# Altium PCB RbMotor_ECAT_RevB+.PcbDoc (part 4 of 4)
Units mm, origin at the board's own origin, x right, y up, seen from the top; angles counter-clockwise.
Board outline 58 x 58 mm, 4 copper layers (F.Cu, In1.Cu, In2.Cu, B.Cu); 285 components, 277 nets, 865 pads, 722 vias.
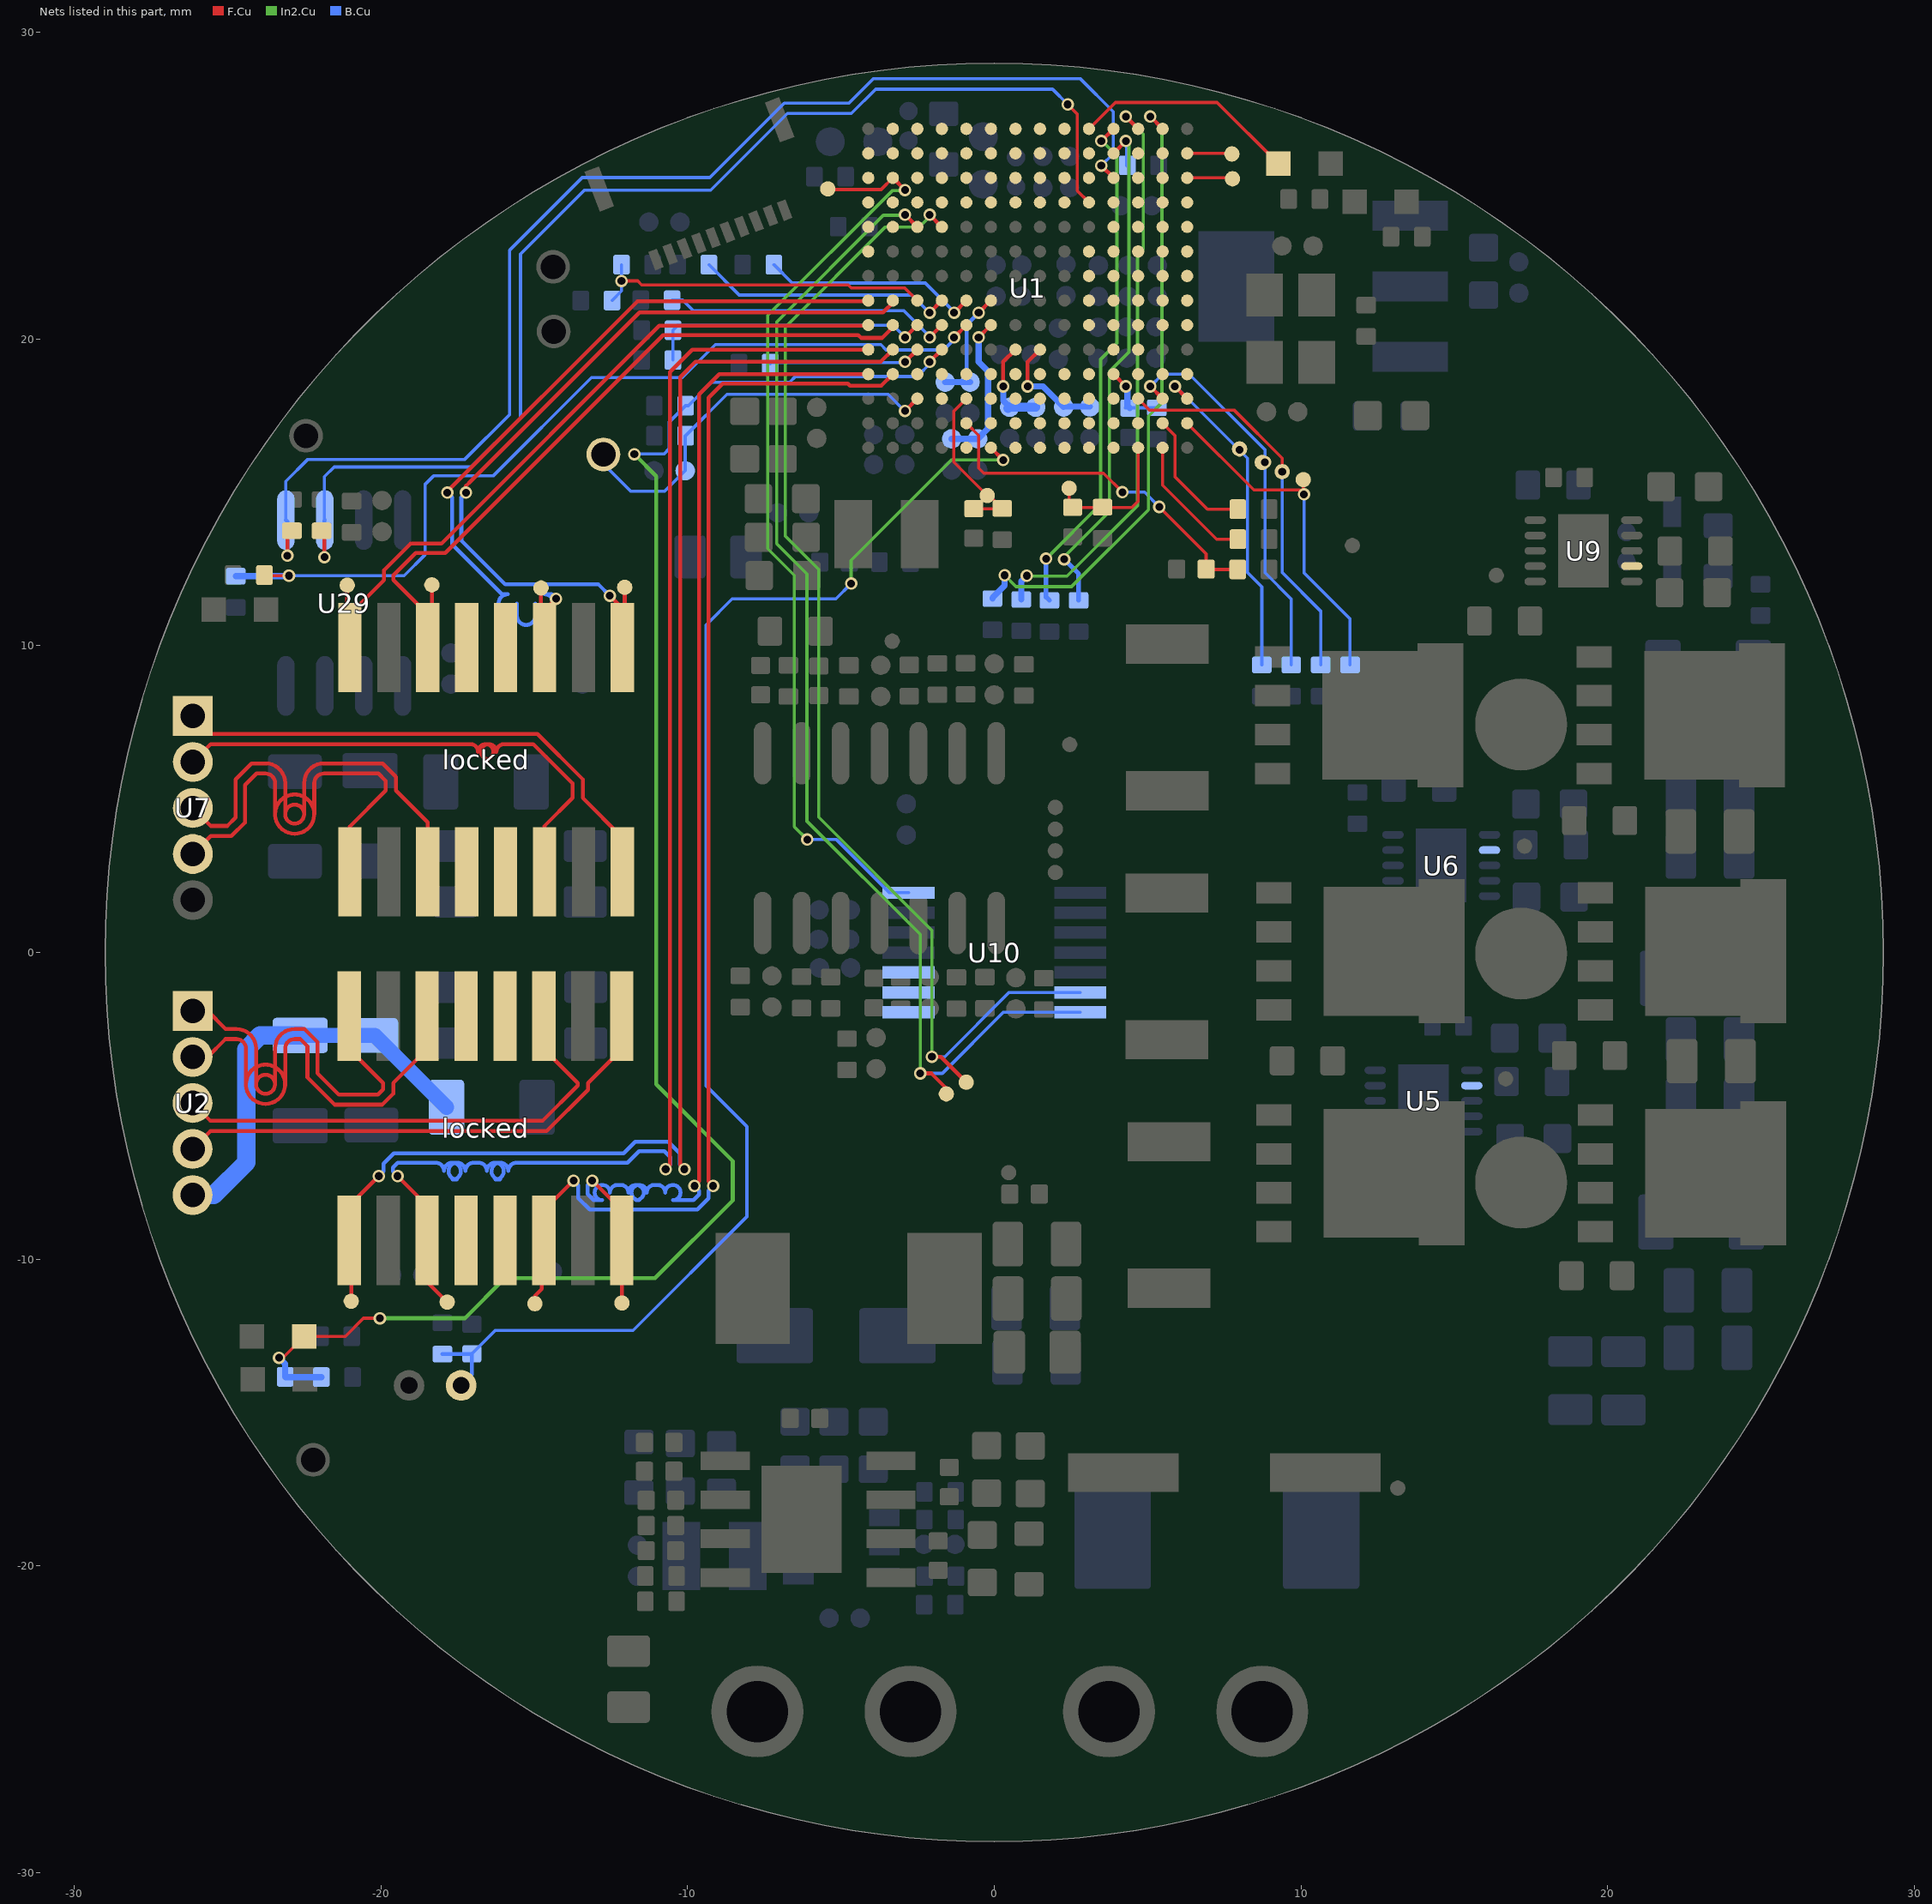
[diagram p5: the nets of this part, all layers, seen from the top]

## Via types
v1: diameter 0.406, hole 0.254, F.Cu to B.Cu, tented both sides, 720 vias
v2: diameter 0.5, hole 0.3, F.Cu to B.Cu, tented both sides, 2 vias

## Nets (pads, with @x,y where several pads share a name; then routed paths per layer and width w, separated by ;. In a path a pad name is that pad's centre, name@x,y a point inside that pad or via, vN(x,y) a via of type N, cw(c..) or ccw(c..) an arc to the next point about the centre after c; other vN are vias at no path point) (continued)
PA16: locked.8@-12.15,-9.391 TP25.1 U1.L1 | length 44
  F.Cu w0.127: v1(-13.115,-7.441) locked.8@-12.15,-8.406 ; locked.8@-12.15,-9.391 -12.145,-9.396 TP25.1@-12.145,-11.434 ; v1(-9.78,-7.615) -9.627,-7.462 -9.627,18.203 -8.97,18.86 U1.L1@-4.11,18.86
  B.Cu w0.127: v1(-13.115,-7.441) -13.268,-7.593 -13.268,-7.885 -13.072,-8.081 -12.785,-8.081 cw(c-12.785,-7.831) -12.535,-7.831 cw(c-12.285,-7.831) -12.285,-7.581 -12.185,-7.581 cw(c-12.185,-7.831) -11.935,-7.831 cw(c-11.685,-7.831) -11.685,-8.081 -11.585,-8.081 cw(c-11.585,-7.831) -11.335,-7.831 cw(c-11.085,-7.831) -11.085,-7.581 -10.985,-7.581 cw(c-10.985,-7.831) -10.735,-7.831 cw(c-10.485,-7.831) -10.485,-8.081 -10.385,-8.081 -9.814,-8.081 -9.627,-7.894 -9.627,-7.767 v1(-9.78,-7.615)
PA17: locked.6@-14.69,-9.391 TP24.1 U1.L2 | length 41.4
  F.Cu w0.127: TP24.1@-14.985,-11.454 -14.985,-11.204 -14.755,-10.974 -14.755,-9.456 locked.6@-14.69,-9.391 ; locked.6@-14.69,-8.406 v1(-13.725,-7.441) ; v1(-9.17,-7.615) -9.323,-7.462 -9.323,18.087 -8.86,18.55 -4.775,18.55 -4.705,18.48 -3.69,18.48 U1.L2@-3.31,18.86
  B.Cu w0.127: v1(-13.725,-7.441) -13.572,-7.593 -13.572,-8.012 -13.198,-8.386 -9.688,-8.386 -9.323,-8.021 -9.323,-7.767 v1(-9.17,-7.615)
PA18: locked.3@-18.5,-9.391 TP23.1 U1.K1 | length 52.5
  F.Cu w0.127: v1(-19.465,-7.294) -18.5,-8.259 locked.3@-18.5,-9.391 -18.5,-10.747 TP23.1@-17.845,-11.402 ; v1(-10.72,-7.07) -10.582,-6.932 -10.582,18.928 -9.85,19.66 U1.K1@-4.11,19.66
  B.Cu w0.127: v1(-19.465,-7.294) -19.618,-7.141 -19.618,-7.012 -19.462,-6.856 -18.225,-6.856 cw(c-18.225,-7.131) -17.95,-7.131 cw(c-17.675,-7.131) -17.675,-7.406 -17.525,-7.406 cw(c-17.525,-7.131) -17.25,-7.131 cw(c-16.975,-7.131) -16.975,-6.856 -16.825,-6.856 cw(c-16.825,-7.131) -16.55,-7.131 cw(c-16.275,-7.131) -16.275,-7.406 -16.125,-7.406 cw(c-16.125,-7.131) -15.85,-7.131 cw(c-15.575,-7.131) -15.575,-6.856 -15.425,-6.856 -11.962,-6.856 -11.587,-6.481 -10.763,-6.481 -10.567,-6.677 -10.567,-6.918 v1(-10.72,-7.07)
PA19: locked.1@-21.04,-9.391 TP22.1 U1.K2 | length 48.9
  F.Cu w0.127: TP22.1@-20.975,-11.374 -20.975,-9.456 locked.1@-21.04,-9.391 -21.04,-8.259 v1(-20.075,-7.294) ; v1(-10.11,-7.07) -10.248,-6.932 -10.248,18.762 -9.74,19.27 -3.7,19.27 U1.K2@-3.31,19.66
  B.Cu w0.127: v1(-20.075,-7.294) -19.922,-7.141 -19.922,-6.885 -19.588,-6.551 -12.088,-6.551 -11.713,-6.176 -10.637,-6.176 -10.263,-6.55 -10.263,-6.918 v1(-10.11,-7.07)
PA20: locked.8@-21.02,9.944 TP29.1 U1.J1 | length 24.2
  F.Cu w0.127: TP29.1@-21.105,11.976 -21.105,10.029 locked.8@-21.02,9.944 -21.02,11.024 -19.902,12.141 -19.902,12.469 -19.043,13.329 -18.038,13.329 -10.927,20.44 U1.J1@-4.06,20.44
PA21: locked.6@-18.48,9.944 TP28.1 U1.J2 | length 24.7
  F.Cu w0.127: TP28.1@-18.345,11.986 -18.345,10.079 locked.6@-18.48,9.944 -18.48,11.024 -19.598,12.141 -19.598,12.304 -18.877,13.024 -17.912,13.024 -10.801,20.135 -4.44,20.135 -4.345,20.04 -3.66,20.04 U1.J2@-3.26,20.44
PA22: locked.3@-14.67,9.944 TP27.1 U1.H1 | length 29.5
  F.Cu w0.127: v1(-17.84,14.996) -17.84,15.037 -11.637,21.24 -4.06,21.24 U1.H1@-4.14,21.16 ; TP27.1@-14.785,11.886 -14.785,10.059 locked.3@-14.67,9.944 -14.67,11.16 v1(-14.295,11.535)
  B.Cu w0.127: v1(-17.84,14.996) -17.687,14.844 -17.687,13.303 -16.064,11.68 -15.87,11.68 ccw(c-15.87,11.38) -15.57,11.38 -15.57,10.98 ccw(c-15.27,10.98) -15.27,10.68 ccw(c-15.27,10.98) -14.97,10.98 -14.97,11.38 ccw(c-14.67,11.38) -14.67,11.68 -14.44,11.68 v1(-14.295,11.535)
PA23: locked.1@-12.13,9.944 TP26.1 U1.H2 | length 27.8
  F.Cu w0.127: v1(-17.23,14.996) -17.23,15.216 -17.073,15.373 -11.571,20.875 -3.625,20.875 U1.H2@-3.26,21.24 ; v1(-12.54,11.63) -12.13,11.22 locked.1@-12.13,9.944 -12.055,10.019 TP26.1@-12.055,11.906
  B.Cu w0.127: v1(-17.23,14.996) -17.383,14.844 -17.383,13.43 -15.953,12 -12.91,12 v1(-12.54,11.63)
PA24: R2.1 U1.K3 | length 5
  F.Cu w0.127: v1(-2.91,19.26) U1.K3@-2.51,19.66
  B.Cu w0.102: R2.1@-7.31,19.2 -7.27,19.24 v1@-2.86,19.24
PA25: LED2.1 R25.1 R39.2 R59.1 U1.K4 | length 56.5
  F.Cu w0.102: v1(-23.33,-13.22) -23.21,-13.22 LED2.1@-22.51,-12.52 -21.17,-12.52 -20.58,-11.93 v1(-20.04,-11.93)
  F.Cu w0.127: v1(-2.11,19.26) U1.K4@-1.71,19.66
  In2.Cu w0.13: v1(-20.04,-11.93) -17.27,-11.93 -15.964,-10.624 -11.064,-10.624 -8.53,-8.09 -8.53,-6.8 -11.025,-4.305 -11.025,15.535 v1(-11.74,16.25)
  B.Cu w0.102: v1(-11.74,16.25) -11.73,16.26 -10.77,16.26 -10.6,16.43 -10.6,17.3 R59.1@-10.07,17.83 -9.98,17.83 -9.22,18.59 -6.68,18.59 -6.49,18.78 -2.52,18.78 v1@-2.06,19.24
  B.Cu w0.2: v1(-23.33,-13.22) -23.13,-13.42 R39.2@-23.13,-13.84 -23.12,-13.85 R25.1@-21.95,-13.85
PA26: R23.1 R56.1 U1.J3 | length 9.3
  F.Cu w0.127: v1(-2.91,20.06) U1.J3@-2.51,20.46
  B.Cu w0.102: R23.1@-10.48,19.32 R56.1@-10.48,20.29 -10.32,20.45 -3.3,20.45 v1(-2.91,20.06)
PA27: R7.1 U1.J4 | length 9.5
  F.Cu w0.127: v1(-2.11,20.06) U1.J4@-1.71,20.46
  B.Cu w0.102: R7.1@-10.51,21.27 -10.16,21.27 -9.82,20.93 -2.95,20.93 v1@-2.06,20.04
PA28: R40.2 R44.1 U1.J5 | length 29.6
  F.Cu w0.102: R40.2@-23.806,12.306 -23.786,12.286 v1(-23.005,12.286)
  F.Cu w0.127: v1(-1.31,20.06) U1.J5@-0.91,20.46
  B.Cu w0.102: v1(-23.005,12.286) -19.254,12.286 -18.56,12.98 -18.56,15.27 -18.29,15.54 -16.35,15.54 -13.14,18.75 -10.17,18.75 -9.1,19.82 -3.7,19.82 -3.53,19.65 -1.65,19.65 v1@-1.26,20.04
  B.Cu w0.2: R44.1@-24.74,12.27 -23.022,12.27 v1(-23.005,12.286)
  B.Cu w0.3: v1@-23.039,12.32 v1(-23.005,12.286)
PA29: R32.1 R51.1 U1.H3 | length 11.2
  F.Cu w0.102: v1(-12.16,21.9) -11.63,21.9 -11.5,21.77 -4.76,21.77 -4.66,21.67 -2.92,21.67 U1.H3@-2.51,21.26
  B.Cu w0.102: R32.1@-12.47,21.26 -12.16,21.57 v1(-12.16,21.9) R51.1@-12.16,22.43
PA30: R61.1 U1.H4 | length 8.4
  F.Cu w0.127: v1(-2.11,20.86) U1.H4@-1.71,21.26
  B.Cu w0.102: R61.1@-9.31,22.43 -8.32,21.44 -2.69,21.44 v1(-2.11,20.86)
PA31: R62.1 U1.H5 | length 7.2
  F.Cu w0.127: v1(-1.31,20.86) U1.H5@-0.91,21.26
  B.Cu w0.102: R62.1@-7.19,22.43 -6.59,21.83 -2.25,21.83 v1@-1.26,20.84
PB0: U1.E1
PB1: U1.E2
PB2: U1.D1
PB3: U1.D2
PB4: U1.C1
PB5: TP32.1 U1.C2 U10.14 | length 30.7
  F.Cu w0.102: TP32.1@-5.43,24.9 -5.41,24.88 -3.69,24.88 U1.C2@-3.31,25.26
  F.Cu w0.127: U1.C2@-3.31,25.26 v1(-2.91,24.86)
  In2.Cu w0.102: v1(-6.1,3.68) -6.52,4.1 -6.52,12.3 -7.39,13.17 -7.39,20.78 -3.33,24.84 v1@-2.86,24.84
  B.Cu w0.102: v1(-6.1,3.68) -5.149,3.68 -3.415,1.946 U10.14@-2.795,1.946
PB6: TP31.1 U1.E3 U10.7 | length 40
  F.Cu w0.127: v1(-2.91,24.06) U1.E3@-2.51,23.66 ; v1(-2.415,-3.944) -2.055,-3.944 -1.565,-4.434 TP31.1@-1.565,-4.614
  In2.Cu w0.102: v1@-2.86,24.04 -3.62,24.04 -7.1,20.56 -7.1,13.33 -6.11,12.34 -6.11,4.28 -2.415,0.585 v1(-2.415,-3.944)
  B.Cu w0.102: v1(-2.415,-3.944) -1.695,-3.944 0.295,-1.954 U10.7@2.805,-1.954
PB7: TP30.1 U1.E4 U10.6 | length 39.8
  F.Cu w0.127: v1(-2.11,24.06) U1.E4@-1.71,23.66 ; v1@-2.045,-3.394 v1(-2.035,-3.404) -1.745,-3.404 TP30.1@-0.915,-4.234
  In2.Cu w0.102: v1@-2.06,24.04 -2.44,23.66 -3.55,23.66 -6.82,20.39 -6.82,13.58 -5.73,12.49 -5.73,4.41 -2.035,0.715 v1(-2.035,-3.404)
  B.Cu w0.102: v1(-2.035,-3.404) -1.615,-3.404 0.485,-1.304 U10.6@2.805,-1.304
PB8: U1.D3
PB9: U1.D4
PB10: U1.C3
PB11: U1.C4
PB24: U1.A2
PB25: U1.B1
PB26: U1.A3
PB27: U1.B2
PB28: U1.A4
PB29: U1.B3
PB30: U1.A5
PB31: U1.B4
PC0: U1.B5
PC1: U1.A6
PC2: U1.B6
PC3: U1.A7
PC4: U1.B7
PC5: U1.A8
PC6: U1.B8
PC7: U1.A9
PC8: U1.B9
PC9: U1.C5
PC10: U1.D5
PC11: U1.C6
PC12: U1.D6
PC13: U1.C7
PC14: U1.D7
PC15: U1.C8
PC16: U1.D8
PC17: U1.C9
PC18: LED4.1 U1.A10 | length 7.4
  F.Cu w0.102: U1.A10@3.09,26.86 3.95,27.72 7.269,27.72 LED4.1@9.269,25.72
PC19: U1.B10
PC20: R89.2 U1.A11 | length 16.7
  F.Cu w0.127: v1(3.49,26.46) U1.A11@3.89,26.86
  In2.Cu w0.102: v1(1.69,12.84) 3.47,14.62 3.47,19.34 4,19.87 4,25.98 v1@3.54,26.44
  B.Cu w0.15: v1(1.69,12.84) 1.69,11.59 R89.2@1.8,11.48
PC21: R43.1 R88.2 U1.B11 | length 17.4
  F.Cu w0.127: U1.B11@3.89,26.06 v1(4.29,26.46)
  In2.Cu w0.102: v1(2.28,12.82) 2.28,12.9 3.76,14.38 3.76,18.95 4.39,19.58 4.39,26.39 v1@4.34,26.44
  B.Cu w0.15: v1(2.28,12.82) 2.75,12.35 R88.2@2.75,11.48 ; v1(4.29,26.46) 4.34,26.41 R43.1@4.34,25.67
PC22: R90.2 U1.A12 | length 19
  F.Cu w0.127: v1(4.29,27.26) U1.A12@4.69,26.86
  In2.Cu w0.102: v1(1.06,12.285) 1.075,12.27 2.37,12.27 4.67,14.57 4.67,22.74 4.86,22.93 4.86,26.69 v1(4.29,27.26)
  B.Cu w0.2: R90.2@0.88,11.51 0.88,12.105 v1(1.06,12.285)
PC23: R91.2 U1.A13 | length 20.5
  F.Cu w0.127: v1(5.09,27.26) U1.A13@5.49,26.86
  In2.Cu w0.102: v1(0.34,12.3) 0.71,11.93 2.52,11.93 5.024,14.434 5.024,17.484 5.47,17.93 5.47,26.88 v1(5.09,27.26)
  B.Cu w0.2: R91.2@-0.06,11.54 -0.06,11.57 0.34,11.97 v1(0.34,12.3)
PC24: TP33.1 U1.B14 | length 1.5
  F.Cu w0.102: U1.B14@6.29,26.06 7.73,26.06 TP33.1@7.75,26.04
PC25: TP35.1 U1.C14 | length 1.5
  F.Cu w0.102: U1.C14@6.29,25.26 7.74,25.26 TP35.1@7.77,25.23
PC26: U1.D14
PC27: U1.D13
PC28: U1.E14
PC29: U1.E13
PC30: U1.F14
PC31: U1.F13
PD0: U1.D9
PD1: U1.C10
PD2: R130.1 U1.D10 U29.6 | length 40.2
  F.Cu w0.102: v1(2.395,27.655) 2.71,27.34 2.71,24.84 U1.D10@3.09,24.46
  F.Cu w0.127: R130.1@-21.94,13.75 -21.85,13.66 v1(-21.85,12.89)
  B.Cu w0.102: U29.6@-21.85,13.76 -21.85,15.513 -21.533,15.83 -17.06,15.83 -15.455,17.435 -15.455,22.775 -13.37,24.86 -9.25,24.86 -6.75,27.36 -4.66,27.36 -3.87,28.15 1.9,28.15 v1(2.395,27.655)
  B.Cu w0.127: v1(-21.85,12.89) -21.85,14.088 U29.6@-21.837,14.101
PD3: R129.1 U1.C11 U29.5 | length 41.8
  F.Cu w0.127: v1(-23.06,12.94) -23.06,13.6 R129.1@-22.91,13.75 ; v1(3.49,25.66) U1.C11@3.89,25.26
  B.Cu w0.102: U29.5@-23.107,14.101 -23.107,15.365 -22.392,16.08 -17.27,16.08 -15.805,17.545 -15.805,22.905 -13.44,25.27 -9.28,25.27 -6.85,27.7 -4.74,27.7 -3.95,28.49 2.81,28.49 3.88,27.42 3.88,26.05 v1(3.49,25.66)
  B.Cu w0.127: U29.5@-23.107,14.101 -23.06,14.055 v1(-23.06,12.94)
PD4: U1.D11
PD5: U1.B12
PD6: U1.C12
PD7: U1.B13
PD8: U1.C13
PD9: U1.D12
PD10: U1.E12
PD11: U1.E11
PD12: U1.F12
PD13: U1.F11
PD14: U1.G14
PD15: U1.G13
PD16: U1.G12
PD17: U1.H14
PD18: U1.H13
PD19: U1.H12
PD20: U1.J14
PD21: U1.J13
PD22: U1.J12
PD23: U1.F10
PD24: U1.G11
PD25: U1.G10
PD26: U1.H11
PD27: U1.H10
PD28: U1.J11
PD29: U1.J10
PD30: U1.K12
PD31: U1.K11
PE: C15.2 C110.1 R10.1 U2.5 | length 13.6
  B.Cu w0.3: C110.1@-22.65,-2.695 C110.1@-22.64,-2.705
  B.Cu w0.5: C110.1@-22.64,-2.705 R10.1@-20.32,-2.705 -20.21,-2.705 C15.2@-17.865,-5.05
  B.Cu w0.6: U2.5@-26.15,-7.91 -25.46,-7.91 -24.4,-6.85 -24.4,-3.16 -23.945,-2.705 C110.1@-22.64,-2.705
PE0: R58.1 TP12.1 U1.M14 | length 10.8
  F.Cu w0.127: v1(5.89,18.46) U1.M14@6.29,18.06
  B.Cu w0.102: v1@5.94,18.44 v1(7.995,16.385) 8.26,16.12 8.26,12.39 8.725,11.925 R58.1@8.725,9.376
PE1: R63.1 TP13.1 U1.M13 | length 12.9
  F.Cu w0.127: v1(5.09,18.46) U1.M13@5.49,18.06
  B.Cu w0.102: v1(5.09,18.46) 5.49,18.86 6.36,18.86 8.83,16.39 v1(8.83,15.99) 8.83,12.38 9.685,11.525 R63.1@9.685,9.376
PE2: R64.1 TP2.1 U1.M12 | length 12.8
  F.Cu w0.102: U1.M12@4.69,18.06 5.07,17.68 7.83,17.68 9.39,16.12 v1(9.39,15.68)
  B.Cu w0.102: v1(9.39,15.68) 9.39,12.39 10.645,11.135 R64.1@10.645,9.376
PE3: R65.1 TP9.1 U1.N14 | length 11.5
  F.Cu w0.102: U1.N14@6.29,17.26 8.47,15.08 9.956,15.08 v1(10.1,14.936) ; v1@10.024,14.936 v1(10.1,14.936) ; TP9.1@10.08,15.42 10.08,14.956 v1(10.1,14.936)
  B.Cu w0.102: v1(10.1,14.936) 10.1,12.38 11.605,10.875 R65.1@11.605,9.376
PE4: R66.1 U1.N13 | length 4.4
  F.Cu w0.102: U1.N13@5.49,17.26 5.89,16.86 5.89,15.52 6.954,14.456 R66.1@7.945,14.456
PE5: R68.1 U1.P13 | length 4.4
  F.Cu w0.102: U1.P13@5.49,16.46 5.49,15.24 7.254,13.476 R68.1@7.945,13.476
PF0: U1.N10
PF1: U1.L10
PF2: U1.P11
PF3: U1.M9
PF4: U1.M8
PF5: U1.L8
PF6: C32.1 R34.2 TP3.1 U1.P12 | length 4.7
  F.Cu w0.102: TP3.1@2.44,15.14 2.44,14.52 2.45,14.51 4.49,14.51 4.69,14.71 U1.P12@4.69,16.46
PF7: U1.M11
PF8: C34.1 R35.2 U1.L11 | length 2.3
  F.Cu w0.127: U1.L11@3.89,18.86 v1(4.29,18.46)
  B.Cu w0.102: C34.1@4.28,17.76 R35.2@5.3,17.76
  B.Cu w0.203: v1@4.34,18.44 4.34,17.83 C34.1@4.42,17.75
PF9: U1.M10
PF10: U1.P10
PF11: U1.L9
PF12: U1.N11
PF13: U1.N12
PF14: U1.N9
PF15: U1.P9
PF16: U1.N7
PF17: U1.P7
PF18: U1.P8
PF19: C35.1 R36.2 TP15.1 U1.M5 | length 6
  F.Cu w0.102: U1.M5@-0.91,18.06 -1.32,17.65 -1.32,15.99 TP15.1@-0.23,14.9 ; TP15.1@-0.23,14.9 -0.16,14.9 R36.2@0.26,14.48 0.25,14.47 C35.1@-0.67,14.47 -0.24,14.9 TP15.1@-0.23,14.9
PF20: U1.N6
PF21: U1.L6
PF22: U1.N8
PF23: U1.L5
PF24: U1.M6
PF25: U1.L7
PF26: C108.1 R49.1 R57.2 U1.P6 | length 45.7
  F.Cu w0.127: U1.P6@-0.11,16.46 v1(0.29,16.06)
  In2.Cu w0.102: v1(-4.67,12.03) -4.67,12.79 -1.4,16.06 v1(0.29,16.06)
  B.Cu w0.102: C108.1@-17.04,-13.09 -16.28,-12.33 -11.783,-12.33 -8.07,-8.617 -8.07,-5.68 -9.4,-4.35 -9.4,10.68 -8.55,11.53 -5.17,11.53 v1(-4.67,12.03)
  B.Cu w0.127: R57.2@-18,-13.1 -17.05,-13.1 C108.1@-17.04,-13.09 -17.04,-13.77 R49.1@-17.39,-14.12
PF27: U1.M7
PF28: U1.P5
PF29: U1.M4
PF30: U1.L4
PF31: C107.1 R48.2 U1.N5 | length 11.7
  F.Cu w0.102: U1.N5@-0.91,17.26 -0.51,16.86 -0.51,15.8 -0.34,15.63 3.56,15.63 v1(4.18,15.01) ; v1(5.38,14.53) 6.91,13 C107.1@6.91,12.5 6.92,12.49 R48.2@7.94,12.49
  B.Cu w0.102: v1(4.18,15.01) 4.9,15.01 v1(5.38,14.53)
RESETN: C48.1 R28.2 TP38.1 U1.M3 | length 13.3
  F.Cu w0.127: v1(-2.91,17.66) U1.M3@-2.51,18.06
  B.Cu w0.102: TP38.1@-12.75,16.24 -12.75,15.93 -11.86,15.04 -10.752,15.04 C48.1@-10.082,15.71 -10.082,16.838 R28.2@-10.07,16.85 -8.72,18.2 -3.46,18.2 -2.92,17.66 v1(-2.91,17.66)
RX0_N: locked.9@-21.02,2.629 U7.4 | length 18.8
  F.Cu w0.127: U7.4@-26.14,3.21 -25.555,3.795 -24.882,3.795 -24.44,4.237 -24.44,5.46 -24.065,5.835 -23.77,5.835 cw(c-23.77,5.525) -23.46,5.525 -23.46,4.51 cw(c-22.82,4.51) -22.82,3.87 cw(c-22.82,4.51) -22.18,4.51 -22.18,5.525 cw(c-21.87,5.525) -21.87,5.835 -20.088,5.835 -19.848,5.594 -19.848,5.281 -21.02,4.109 locked.9@-21.02,2.629
RX0_P: locked.11@-18.48,2.629 U7.3 | length 17.2
  F.Cu w0.127: U7.3@-26.14,4.71 -25.555,4.125 -25.018,4.125 -24.75,4.393 -24.75,5.64 -24.225,6.165 -23.77,6.165 cw(c-23.77,5.525) -23.13,5.525 -23.13,4.51 cw(c-22.82,4.51) -22.82,4.2 cw(c-22.82,4.51) -22.51,4.51 -22.51,5.525 cw(c-21.87,5.525) -21.87,6.165 -21.768,6.165 -19.952,6.165 -19.518,5.731 -19.518,5.281 -18.48,4.244 locked.11@-18.48,2.629
RX1_N: locked.9@-12.15,-2.076 U2.4 | length 16.6
  F.Cu w0.127: U2.4@-26.15,-6.41 -25.565,-5.825 -14.602,-5.825 -13.255,-4.478 -13.255,-4.26 -12.15,-3.155 locked.9@-12.15,-2.076
RX1_P: locked.11@-14.69,-2.076 U2.3 | length 17.5
  F.Cu w0.102: locked.11@-14.63,-2.406 locked.11@-14.63,-0.899
  F.Cu w0.127: U2.3@-26.15,-4.91 -25.565,-5.495 -14.738,-5.495 -13.585,-4.342 -13.585,-4.26 -14.69,-3.155 locked.11@-14.69,-2.076
TX0_N: locked.14@-14.67,2.629 U7.2 | length 18.6
  F.Cu w0.127: U7.2@-26.14,6.21 -25.555,6.795 -17.09,6.795 cw(c-17.09,6.544) -16.839,6.544 cw(c-16.589,6.544) -16.589,6.294 -16.49,6.294 cw(c-16.49,6.544) -16.239,6.544 cw(c-15.989,6.544) -15.989,6.795 -15.89,6.795 -15.038,6.795 -13.755,5.512 -13.755,5.04 -14.67,4.125 locked.14@-14.67,2.629
TX0_P: locked.16@-12.13,2.629 U7.1 | length 17.1
  F.Cu w0.127: U7.1@-26.14,7.71 -25.555,7.125 -14.902,7.125 -13.425,5.648 -13.425,5.04 -12.13,3.745 locked.16@-12.13,2.629
TX1_N: locked.14@-18.5,-2.076 U2.2 | length 18.8
  F.Cu w0.127: U2.2@-26.15,-3.41 -25.66,-3.41 -25.075,-2.825 -24.72,-2.825 cw(c-24.72,-3.135) -24.41,-3.135 -24.41,-4.3 cw(c-23.77,-4.3) -23.77,-4.94 cw(c-23.77,-4.3) -23.13,-4.3 -23.13,-3.135 cw(c-22.82,-3.135) -22.82,-2.825 -22.638,-2.825 -22.404,-3.059 -22.404,-4.079 -21.518,-4.965 -19.962,-4.965 -19.605,-4.608 -19.605,-4.26 -18.5,-3.155 locked.14@-18.5,-2.076
TX1_P: locked.16@-21.04,-2.076 U2.1 | length 16.2
  F.Cu w0.127: U2.1@-26.15,-1.91 -25.66,-1.91 -25.075,-2.495 -24.72,-2.495 cw(c-24.72,-3.135) -24.08,-3.135 -24.08,-4.3 cw(c-23.77,-4.3) -23.77,-4.61 cw(c-23.77,-4.3) -23.46,-4.3 -23.46,-3.135 cw(c-22.82,-3.135) -22.82,-2.495 -22.502,-2.495 -22.074,-2.923 -22.074,-3.943 -21.382,-4.635 -20.098,-4.635 -19.935,-4.472 -19.935,-4.26 -21.04,-3.155 locked.16@-21.04,-2.076
unconnected-(T1-Pad4): locked.4@-17.23,-9.391
unconnected-(T1-Pad5): locked.5@-15.96,-9.391
unconnected-(T1-Pad12): locked.12@-15.96,-2.076
unconnected-(T1-Pad13): locked.13@-17.23,-2.076
unconnected-(T2-Pad4): locked.4@-15.94,9.944
unconnected-(T2-Pad5): locked.5@-17.21,9.944
unconnected-(T2-Pad12): locked.12@-17.21,2.629
unconnected-(T2-Pad13): locked.13@-15.94,2.629
unconnected-(U1C-USB0_DN-PadL13): U1.L13
unconnected-(U1C-USB0_DP-PadL14): U1.L14
unconnected-(U1C-USB0_VBUS-PadL12): U1.L12
unconnected-(U1D-PA09{slash}GPTMR0.CAPT1{slash}UART2.RXD{slash}I2C0.SDA{slash}SPI0.CS1{slash}MCAN2.RXD{slash}ESC0.REFCK{slash}PWM1.P1{slash}TRGM.P09{slash}RDC0.PWM_P{slash}QEO2.A{slash}SEI2.RX{slash}SDM1.CLK0{slash}ETH0.EVTO2{slash}TSW0.EVTO2-PadF1): U1.F1
unconnected-(U5-NC-Pad2): U5.2
unconnected-(U6-NC-Pad2): U6.2
unconnected-(U9-NC-Pad2): U9.2
unconnected-(U10-U-Pad10): U10.10
unconnected-(U10-V-Pad9): U10.9
unconnected-(U10-W{slash}PWM-Pad8): U10.8
VDD_OTPCAP: C36.1 C40.1 U1.K7 | length 3
  F.Cu w0.127: v1(0.29,18.46) 0.29,19.26 U1.K7@0.69,19.66
  B.Cu w0.2: v1(0.29,18.46) 0.29,17.99 C40.1@0.5,17.78
  B.Cu w0.3: C40.1@0.45,17.748 C40.1@0.49,17.788 ; C40.1@0.5,17.78 C36.1@1.35,17.78
VDD_PHY0CAP: C12.1 C88.1 U1.J6 | length 5
  F.Cu w0.127: v1(-0.51,20.06) U1.J6@-0.11,20.46
  B.Cu w0.203: C12.1@-1.39,16.748 C88.1@-0.54,16.748 -0.2,17.088 -0.2,18.95 -0.51,19.26 v1(-0.51,20.06)
VDD_PHY1CAP: C11.1 C67.1 U1.H6 | length 3.9
  F.Cu w0.127: v1(-0.51,20.86) U1.H6@-0.11,21.26
  B.Cu w0.102: v1@-0.46,20.84 v1@-0.46,20.852
  B.Cu w0.127: C67.1@-0.79,18.598 -0.9,18.708 -0.9,20.47 v1(-0.51,20.86)
  B.Cu w0.203: C11.1@-1.6,18.598 C67.1@-0.79,18.598
VDD_PMCCAP: C44.1 C45.1 U1.K8 | length 3.7
  F.Cu w0.127: v1(1.09,18.46) 1.09,19.26 U1.K8@1.49,19.66
  B.Cu w0.2: v1(1.09,18.46) 1.588,18.46 C45.1@2.26,17.788 2.272,17.8 C44.1@3.11,17.8
WAKEUP: U1.L3

## Polygon pours and split planes (outlines as drawn)
GND on F.Cu "F.Cu-GND-1" (solid, remove dead copper, pour order 105): -10.295,29.926 -10.265,29.896 11.185,29.896 19.145,21.936 19.145,20.166 11.055,12.076 8.375,12.076 8.325,12.026 8.325,12.106 6.825,12.066 3.105,12.066 2.485,11.446 2.485,-13.734 0.735,-15.484 0.68,-15.484 0.615,-15.484 0.615,-20.264 -0.48,-21.359 -0.48,-21.384 -0.58,-21.484 -9.555,-21.484 -10.075,-22.004 -10.075,-22.014 -11.735,-23.674 -17.705,-23.674 -20.885,-21.204 -31.025,-11.064 -31.025,9.096 -10.451,29.671 -10.568,29.663 -10.295,29.936
+3.3VA on F.Cu "F.Cu-+3.3VA" (solid, remove dead copper, pour order 51): -2.5,3.62 -2.18,3.62 -2.05,3.75 -2.05,4.56 -2.13,4.64 -2.42,4.64 -2.5,4.56 -2.5,4.52
+24V on F.Cu "F.Cu-+24V" (solid, remove dead copper, pour order 53): 0.906,-21.843 1.525,-21.224 1.525,-19.344 2.335,-18.534 6.675,-18.534 6.865,-18.344 6.865,-15.124 10.085,-11.904 16.515,-11.904 17.795,-11.914 21.235,-8.474 21.235,8.956 22.045,9.766 27.795,9.766 28.305,9.256 29.695,7.866 29.695,-11.764 12.825,-28.634 -8.805,-28.634 -9.425,-28.014 -9.425,-23.774 -7.485,-21.834 0.915,-21.834
MOTOR-V on F.Cu "F.Cu-/ MAIN/13.Motor DriverB/MOTOR-V" (solid, remove dead copper, pour order 74): 20.265,2.326 20.265,-0.884 20.215,-0.934 18.895,-0.934 18.615,-1.214 18.615,-1.814 18.295,-2.134 11.015,-2.134 10.805,-1.924 10.805,2.296 10.835,2.326
DCDC_LP on F.Cu "F.Cu-DCDC_LP" (solid, remove dead copper, pour order 87): -2.63,16.6 -2.41,16.6 -2.32,16.51 -2.32,15.54 -1.93,15.15 -1.93,13.47 -2.18,13.22 -2.73,13.22 -3.07,13.56 -3.07,15.57 -2.79,15.85 -2.79,16.46 -3.08,16.75 -3.09,16.75 -3.46,17.12 -3.46,17.34 -3.4,17.4 -3.2,17.4 -2.33,16.53 -2.33,16.15 -2.63,16.45
BGND on F.Cu "F.Cu-BGND-3" (solid, remove dead copper, pour order 62): 3.785,-2.183 3.785,-4.214 4.065,-4.494 7.755,-4.494 8.125,-4.124 8.125,-2.304 8.005,-2.184 7.214,-2.184 7.215,-2.183
DCDC_GND on F.Cu "F.Cu-DCDC_GND" (solid, remove dead copper, pour order 92): -7.29,15.95 -7.29,11.98 -7.4,11.87 -7.9,11.87 -8.395,12.365 -8.395,15.15 -8.395,15.95
MOTOR-W on F.Cu "F.Cu-/ MAIN/14.Motor DriverC/MOTOR-W" (solid, remove dead copper, pour order 73): 20.155,9.856 20.155,6.646 20.105,6.596 18.785,6.596 18.505,6.316 18.505,5.716 18.185,5.396 10.905,5.396 10.695,5.606 10.695,9.826 10.725,9.856
MT_IV on F.Cu "F.Cu-MT_IV" (solid, remove dead copper, pour order 59): 4.305,2.676 4.815,3.186 9.195,3.186 9.695,2.686 9.695,-0.964 9.685,-0.974 7.455,-0.974 6.985,-0.504 6.985,1.266 6.955,1.296 4.305,1.296
+3.3V on F.Cu "F.Cu-+3.3V" (solid, remove dead copper, pour order 101): -4.64,18.19 -3.41,18.19 -3.39,18.17 -3.39,17.85 -3.51,17.73 -4.44,17.73 -4.54,17.63 -5.908,17.63 -5.96,17.682 -5.96,18.01 -5.874,18.096 -4.884,18.096 -4.8,18.18 -4.64,18.18
Net-(D6-K) on F.Cu "F.Cu-Net-(D6-K)" (solid, remove dead copper, pour order 54): -8.39,-11.6 -8.39,-15.07 -9.45,-16.13 -9.45,-16.51 -9.22,-16.74 -8.131,-16.74 -7.973,-16.581 -7.973,-16.093 -7.28,-15.4 -7.28,-11.56 -7.41,-11.43 -8.22,-11.43
MOTOR-U on F.Cu "F.Cu-/ MAIN/12.Motor DriverA/MOTOR-U" (solid, remove dead copper, pour order 72): 20.195,-4.974 20.195,-8.184 20.145,-8.234 18.825,-8.234 18.545,-8.514 18.545,-9.114 18.225,-9.434 10.945,-9.434 10.735,-9.224 10.735,-5.004 10.765,-4.974
MT_IW on F.Cu "F.Cu-MT_IW" (solid, remove dead copper, pour order 58): 4.295,11.136 4.645,11.486 8.725,11.486 9.665,10.546 9.665,6.756 9.525,6.616 7.435,6.616 7.075,6.976 7.075,9.286 6.945,9.416 4.295,9.416
+12V on F.Cu "F.Cu-+12V" (solid, remove dead copper, pour order 97): 1.87,-12.68 1.87,-14.11 1.4,-14.58 1.4,-14.97 1.7,-15.27 1.94,-15.27 2.56,-14.65 2.56,-13.287 1.953,-12.68
BGND on F.Cu "F.Cu-BGND-2" (solid, remove dead copper, pour order 61): 3.805,-10.293 3.805,-12.554 3.965,-12.714 7.175,-12.714 8.125,-11.764 8.125,-10.414 8.005,-10.294 7.214,-10.294 7.215,-10.293
GND on F.Cu "F.Cu-GND" (solid, remove dead copper, pour order 104): -0.85,-15.19 0.95,-15.19 1.57,-15.81 1.57,-16.29 1.22,-16.64 0.44,-16.64 0.435,-16.635 -1.115,-16.635 -1.18,-16.57 -1.18,-15.52
BGND on F.Cu "F.Cu-BGND-1" (solid, remove dead copper, pour order 93): -12.59,-25.16 -12.06,-25.69 -10.5,-25.69 -10.36,-25.55 -10.36,-24.479 -10.755,-24.084 -12.044,-24.084 -12.048,-24.088 -12.59,-24.127
AGND on F.Cu "F.Cu-AGND" (solid, remove dead copper, pour order 103): -5.67,10.955 -4.635,10.955 -4.41,10.73 -4.41,10.46 -4.85,10.02 -5.77,10.02 -5.79,10.02 -5.92,10.15 -5.92,10.705
MT_IU on F.Cu "F.Cu-MT_IU" (solid, remove dead copper, pour order 57): 4.265,-5.154 4.485,-4.934 9.605,-4.934 9.735,-5.064 9.735,-8.134 9.675,-8.194 7.505,-8.194 7.245,-7.934 7.245,-6.954 7.105,-6.814 4.265,-6.814
+12VA on F.Cu "F.Cu-+12VA" (solid, remove dead copper, pour order 89): -1.622,-9.15 0.51,-9.15 0.51,-13.297 0.188,-13.62 -0.29,-13.62 -1.622,-12.288
BGND on F.Cu "F.Cu-BGND" (solid, remove dead copper, pour order 60): 3.695,5.917 3.695,3.976 4.015,3.656 7.645,3.656 8.125,4.136 8.125,5.796 8.005,5.916 7.214,5.916 7.215,5.917
+1V2 on F.Cu "F.Cu-+1V2" (solid, remove dead copper, pour order 91): -6.43,15.28 -5.54,15.28 -5.2,14.94 -4.29,14.94 -3.96,14.61 -3.96,12.87 -4.24,12.59 -5.28,12.59 -5.58,12.29 -6.115,12.29 -6.39,12.565 -6.39,14.33 -6.53,14.47 -6.53,15.18
+1V2 on In2.Cu "In2.Cu-+1V2" (solid, remove dead copper, pour order 83): 2.57,23.64 2.81,23.4 2.81,22.51 2.56,22.26 2.56,22.25 2.47,22.16 0.13,22.16 -0.82,21.21 -2.34,21.21 -3.51,20.04 -3.51,15.59 -4.66,14.44 -5.732,14.44 -6.3,15.008 -6.3,20.17 -4.39,22.08 -1.95,22.08 -0.88,23.15 -0.88,23.49 -0.73,23.64
MT_IW on In2.Cu "In2.Cu-MT_IW" (solid, remove dead copper, pour order 75): 4.225,11.656 7.635,11.656 8.435,10.856 8.435,7.336 8.065,6.966 6.145,6.966 4.015,9.096 4.015,11.446
+12V on In2.Cu "In2.Cu-+12V-1" (solid, remove dead copper, pour order 56): 19.935,12.046 19.935,15.716 20.065,15.846 21.005,15.846 21.135,15.716 21.135,11.226 20.575,10.666 19.435,10.666 19.435,11.546
GND on In2.Cu "In2.Cu-GND-1" (solid, remove dead copper, pour order 88): 1.14,-13.75 1.14,-16.12 0.61,-16.65 -0.32,-16.65 -0.64,-16.33 -0.64,-14.92 0.53,-13.75
+3.3V on In2.Cu "In2.Cu-+3.3V-1" (solid, remove dead copper, pour order 86): -10.26,16.44 -10.59,16.77 -11.05,16.77 -11.31,17.03 -11.31,17.43 -11.04,17.7 -9.02,17.7 -8.46,18.26 -8.11,18.26 -7.83,17.98 -7.83,17.16 -7.79,17.12 -7.79,16.89 -8.42,16.26 -8.42,14.68 -8.42,10.06 -7.65,9.29 -7.65,3.72 -6.3,2.37 -6.3,-0.15 -5.22,-1.23 -5.22,-9.69 -9.4,-13.87 -9.39,-13.87 -11.06,-15.54 -12.07,-15.54 -12.2,-15.41 -12.2,-14.48 -11.29,-13.57 -11.29,-12.24 -8,-8.95 -8,-5.67 -10.27,-3.4 -10.27,15.87 -10.26,15.88
+24V on In2.Cu "In2.Cu-+24V-1" (solid, remove dead copper, pour order 99): 1.33,-17.15 2.13,-16.35 2.13,-15.57 3,-14.7 7.52,-14.7 8.8,-15.98 8.8,-25.18 5.55,-28.43 -8.94,-28.43 -10.13,-27.24 -10.13,-21.66 -8.27,-19.8 -8.27,-17.52 -7.9,-17.15
BGND on In2.Cu "In2.Cu-BGND" (solid, remove dead copper, pour order 110): 3.535,6.416 3.535,3.436 3.925,3.046 4.395,3.046 4.485,2.956 4.485,-1.974 3.585,-2.874 3.585,-12.404 4.365,-13.184 7.515,-13.184 8.455,-12.244 8.455,-12.254 9.635,-11.074 9.725,-11.074 11.125,-9.674 11.125,5.526 10.105,6.546 3.655,6.546 3.535,6.426
+3.3V on In2.Cu "In2.Cu-+3.3V" (solid, remove dead copper, pour order 55): -11.48,23.46 -10.36,22.34 -8.73,22.34 -4.73,26.34 -1.4,26.34 -0.7,25.64 -0.7,25.63 -0.47,25.4 1.9,25.4 2.19,25.11 2.19,24.7 2.07,24.58 -0.76,24.58 -1.63,25.45 -4.42,25.45 -7.83,22.04 -7.83,16.93 -7.98,16.78 -8.5,16.78 -8.75,17.03 -8.98,17.03 -9.02,17.07 -9.02,17.71 -8.61,18.12 -8.61,21.46 -8.73,21.58 -10.5,21.58 -11.93,23.01 -11.93,23.28 -11.75,23.46
GND on In2.Cu "In2.Cu-GND" (solid, remove dead copper, pour order 109): -9.69,30.45 13.68,30.45 21.185,22.945 21.185,17.836 19.255,15.906 13.605,15.906 9.865,12.166 3.845,12.166 3.015,11.336 3.015,-2.675 2.34,-3.35 2.34,-3.96 2.89,-4.51 2.89,-12.47 -0.86,-16.22 -5.069,-16.22 -7.331,-16.239 -8.665,-17.574 -8.665,-18.884 -10.202,-20.42 -20.67,-20.42 -29.19,-11.9 -29.19,14.21 -12.92,30.48 -9.69,30.48
+12V on In2.Cu "In2.Cu-+12V" (solid, remove dead copper, pour order 48): 20.685,11.126 20.685,5.696 20.695,5.686 20.695,-8.414 17.615,-11.494 14.415,-11.494 14.135,-11.214 14.135,-10.714 14.335,-10.204 14.335,-10.114 14.575,-10.054 17.515,-10.054 19.785,-7.784 19.785,-4.094 19.785,-3.874 19.295,-3.384 15.495,-3.384 15.365,-3.254 15.365,-2.614 15.725,-2.254 19.125,-2.254 19.585,-1.794 19.585,3.846 19.295,4.136 16.445,4.136 16.145,4.436 16.145,5.046 16.525,5.426 18.995,5.426 19.345,5.776 19.345,11.456 19.515,11.626 20.185,11.626
MT_IU on In2.Cu "In2.Cu-MT_IU" (solid, remove dead copper, pour order 81): 7.195,-4.954 8.505,-4.954 8.625,-5.074 8.625,-7.794 8.475,-7.944 7.315,-7.944 7.175,-7.804 7.175,-4.974
MT_IV on In2.Cu "In2.Cu-MT_IV" (solid, remove dead copper, pour order 78): 7.055,2.516 8.455,2.516 8.455,-0.794 8.375,-0.874 7.135,-0.874 7.045,-0.784 7.045,2.506
MOTOR-W on In2.Cu "In2.Cu-/ MAIN/14.Motor DriverC/MOTOR-W" (solid, remove dead copper, pour order 71): 13.155,9.506 18.645,9.506 18.645,6.796 13.155,6.796
MOTOR-U on In2.Cu "In2.Cu-/ MAIN/12.Motor DriverA/MOTOR-U" (solid, remove dead copper, pour order 70): 12.145,-6.824 17.925,-6.824 17.925,-8.624 17.165,-9.384 12.145,-9.384
MOTOR-V on In2.Cu "In2.Cu-/ MAIN/13.Motor DriverB/MOTOR-V" (solid, remove dead copper, pour order 69): 12.345,0.906 18.125,0.906 18.125,-1.864 18.125,-1.824 12.345,-1.824
+3.3VA on In2.Cu "In2.Cu-+3.3VA" (solid, remove dead copper, pour order 50): -2.5,3.62 -2.18,3.62 -2.05,3.75 -2.05,4.56 -2.13,4.64 -2.42,4.64 -2.5,4.56 -2.5,4.52
+24V on In2.Cu "In2.Cu-+24V" (solid, remove dead copper, pour order 52): 0.906,-21.843 1.525,-21.224 1.525,-19.344 2.335,-18.534 6.675,-18.534 6.865,-18.344 6.865,-15.124 10.085,-11.904 16.515,-11.904 17.795,-11.914 21.235,-8.474 21.235,8.956 22.045,9.766 27.795,9.766 28.305,9.256 29.695,7.866 29.695,-11.764 12.825,-28.634 -8.805,-28.634 -9.425,-28.014 -9.425,-23.774 -7.485,-21.834 0.915,-21.834
+24V on B.Cu "B.Cu-+24V-1" (solid, remove dead copper, pour order 84): 10.435,-16.824 12.505,-16.824 12.505,-18.264 12.515,-18.274 12.465,-18.324 10.465,-18.324 10.435,-18.294 10.435,-17.894
BGND on B.Cu "B.Cu-BGND" (solid, remove dead copper, pour order 111): 0.02,-22.27 2.57,-19.72 2.57,-12.96 3.67,-11.86 3.67,-3.61 4.31,-2.97 4.31,2.88 3.69,3.5 3.69,5.9 4.46,6.67 8.16,6.67 11.136,9.646 11.496,9.646 11.77,9.92 11.77,11.01 12.26,11.5 15.97,11.5 18.05,13.58 19.66,13.58 20.22,13.02 23.5,13.02 23.95,12.57 23.95,10.89 23.52,10.46 23.52,-13.31 23.213,-13.617 18.343,-13.617 17.7,-14.26 17.7,-23.04 12.88,-27.86 -4.35,-27.86 -5.24,-26.97 -5.24,-22.73 -4.78,-22.27
MOTOR-V on B.Cu "B.Cu-/ MAIN/13.Motor DriverB/MOTOR-V" (solid, remove dead copper, pour order 65): 12.085,0.816 18.345,0.816 18.345,-1.544 18.195,-1.694 16.085,-1.694 12.275,-1.694 12.085,-1.504
+3.3VA on B.Cu "B.Cu-+3.3VA" (solid, remove dead copper, pour order 102): 1.81,19.653 5.643,19.653 6.73,20.74 7.21,20.74 7.38,20.57 7.38,19.93 7.35,19.9 6.66,19.9 5.86,19.1 1.88,19.1 1.81,19.16
MOTOR-W on B.Cu "B.Cu-/ MAIN/14.Motor DriverC/MOTOR-W" (solid, remove dead copper, pour order 64): 12.945,9.696 18.875,9.696 18.875,6.966 18.685,6.776 16.565,6.776 13.105,6.776 12.885,6.996 12.885,9.636
DCDC_GND on B.Cu "B.Cu-DCDC_GND" (solid, remove dead copper, pour order 95): -8.35,12.2 -7.76,12.2 -7.42,12.54 -7.39,12.54 -6.77,13.16 -6.77,14.97 -7.31,15.51 -7.51,15.5 -7.57,15.56 -8.29,15.56 -8.35,15.5
+12V on B.Cu "B.Cu-+12V" (solid, remove dead copper, pour order 96): 1.21,-14.44 2.44,-14.44 2.52,-14.52 2.52,-14.84 2.01,-15.35 1.56,-15.35 1.16,-14.95 1.16,-14.49
+12VA on B.Cu "B.Cu-+12VA" (solid, remove dead copper, pour order 98): -0.15,-11.06 -0.15,-13.96 0.79,-13.96 0.85,-13.9 0.85,-11.29 0.62,-11.06
+24V on B.Cu "B.Cu-+24V" (solid, remove dead copper, pour order 49): 23.815,10.166 23.815,-13.404 23.335,-13.884 18.65,-13.884 17.895,-14.638 17.895,-15.484 18.345,-15.934 23.605,-15.934 29.215,-10.324 29.215,6.966 25.855,10.326 23.975,10.326
AGND on B.Cu "B.Cu-AGND" (solid, remove dead copper, pour order 90): 5.48,20.676 5.587,20.568 5.587,20.188 5.43,20.03 1.9,20.03 1.76,20.17 1.76,20.49 1.946,20.676
MOTOR-U on B.Cu "B.Cu-/ MAIN/12.Motor DriverA/MOTOR-U" (solid, remove dead copper, pour order 63): 12.075,-7.014 17.995,-7.014 17.995,-9.284 17.655,-9.624 16.595,-9.624 12.105,-9.624 12.025,-9.544 12.025,-7.064
MT_IW on B.Cu "B.Cu-MT_IW" (solid, remove dead copper, pour order 82): 7.275,11.216 8.085,10.406 8.085,7.246 7.925,7.086 7.305,7.086 7.115,7.276 7.115,10.416 6.915,10.616 4.335,10.616 4.245,10.706 4.245,11.126 4.335,11.216
MT_IU on B.Cu "B.Cu-MT_IU" (solid, remove dead copper, pour order 80): 7.195,-4.954 8.505,-4.954 8.625,-5.074 8.625,-7.794 8.475,-7.944 7.315,-7.944 7.175,-7.804 7.175,-4.974
MT_IV on B.Cu "B.Cu-MT_IV" (solid, remove dead copper, pour order 77): 7.055,2.516 8.455,2.516 8.455,-0.794 8.375,-0.874 7.135,-0.874 7.045,-0.784 7.045,2.506
GND on B.Cu "B.Cu-GND" (solid, remove dead copper, pour order 106): -10.295,29.926 -10.265,29.896 11.185,29.896 19.145,21.936 19.145,20.166 11.055,12.076 8.375,12.076 8.325,12.026 8.325,12.106 6.825,12.066 3.105,12.066 2.485,11.446 2.485,-13.734 0.735,-15.484 0.68,-15.484 0.615,-15.484 0.615,-20.264 -0.48,-21.359 -0.48,-21.384 -0.58,-21.484 -9.555,-21.484 -10.075,-22.004 -10.075,-22.014 -11.735,-23.674 -17.705,-23.674 -20.885,-21.204 -31.025,-11.064 -31.025,9.096 -10.451,29.671 -10.568,29.663 -10.295,29.936
MT_IU on In1.Cu "In1.Cu-MT_IU" (solid, remove dead copper, pour order 79): 7.195,-4.954 8.505,-4.954 8.625,-5.074 8.625,-7.794 8.475,-7.944 7.315,-7.944 7.175,-7.804 7.175,-4.974
MT_IV on In1.Cu "In1.Cu-MT_IV" (solid, remove dead copper, pour order 76): 7.055,2.516 8.455,2.516 8.455,-0.794 8.375,-0.874 7.135,-0.874 7.045,-0.784 7.045,2.506
MOTOR-W on In1.Cu "In1.Cu-/ MAIN/14.Motor DriverC/MOTOR-W" (solid, remove dead copper, pour order 68): 13.155,9.506 18.645,9.506 18.645,6.796 13.155,6.796
MOTOR-U on In1.Cu "In1.Cu-/ MAIN/12.Motor DriverA/MOTOR-U" (solid, remove dead copper, pour order 67): 12.145,-6.824 17.925,-6.824 17.925,-8.624 17.165,-9.384 12.145,-9.384
MOTOR-V on In1.Cu "In1.Cu-/ MAIN/13.Motor DriverB/MOTOR-V" (solid, remove dead copper, pour order 66): 12.345,0.906 18.125,0.906 18.125,-1.864 18.125,-1.824 12.345,-1.824
AGND on In1.Cu "In1.Cu-AGND" (solid, remove dead copper, pour order 85): 2.1,21.1 2.3,20.9 2.3,19.11 4.48,16.93 4.48,15.76 4.35,15.63 3.405,15.63 2.82,15.03 1.65,13.86 1.65,11.59 -1.87,8.07 -1.87,-0.55 -3.38,-2.06 -4.479,-2.06 -4.69,-1.849 -4.69,-1.29 -3.21,0.19 -3.21,2.46 -4.06,3.31 -4.06,7.837 -4.831,8.608 -4.818,8.608 -5.51,9.3 -5.51,10.68 -5.198,10.992 -3.648,10.992 -0.03,14.61 -0.03,17.83 0.76,18.62 0.76,20.58 1.28,21.1
BGND on In1.Cu "In1.Cu-BGND-1" (solid, remove dead copper, pour order 94): -5.86,-21.73 -4.525,-20.395 -4.525,-20.384 -4.442,-20.3 -3.69,-20.3 -2.99,-21 -2.99,-25.66 -3.49,-26.16 -4.59,-26.16 -5.47,-25.28 -5.47,-23.8 -6.32,-22.95 -8.77,-22.95 -9.82,-24 -9.82,-25.47 -10.33,-25.98 -11.97,-25.98 -12.26,-25.69 -12.26,-23.99 -9.993,-21.723 -10,-21.73
BGND on In1.Cu "In1.Cu-BGND" (solid, remove dead copper, pour order 108): -3.085,-28.964 12.105,-28.964 29.025,-12.044 29.025,10.436 25.325,14.136 7.385,14.136 3.625,10.376 3.625,-12.234 -4.525,-20.384 -4.525,-27.494 -3.085,-28.934
GND on In1.Cu "In1.Cu-GND-1" (solid, remove dead copper, pour order 100): -1.06,-15.19 -0.4,-14.53 -0.23,-14.53 1.18,-15.94 1.18,-16.29 0.84,-16.63 0.38,-16.63
GND on In1.Cu "In1.Cu-GND" (solid, remove dead copper, pour order 107): 12.145,28.866 19.405,21.606 19.405,18.186 16.895,15.676 7.535,15.676 2.715,10.856 2.715,-11.884 -3.315,-17.914 -3.315,-18.559 -5.765,-21.045 -5.92,-21.24 -10.292,-21.24 -11.576,-22.604 -18.475,-22.604 -29.235,-11.844 -29.235,11.696 -15.186,25.746 -14.005,26.336 -4.985,28.866

## Keep-outs
F.Cu:
  region: -11.229,-5.288 -12.605,-6.664 -18.904,-6.664 -18.902,-6.666 -22.487,-6.666 -24.155,-8.334 -28.215,-8.334 -29.755,-6.794 -29.755,6.506 -28.885,7.376 -11.229,7.376
  region: 0.29,2.14 0.29,1.91 -6.56,1.91 -6.57,1.92 -6.57,2.15 0.28,2.15
  region: -0.91,14.75 -1.69,14.75 -1.7,14.76 -1.7,15.73 -1.68,15.75 -0.91,15.75
  region: 6.64,27.87 6.64,16.97 6.62,16.95 -4.37,16.95 -4.37,27.97 6.54,27.97
  region: -0.27,5.81 -0.27,5.58 -7.12,5.58 -7.13,5.59 -7.13,5.82 -0.28,5.82
  region: -3.88,15.74 -4.9,15.74 -4.91,15.75 -4.91,16.72 -4.89,16.74 -3.88,16.74
  region: -8.78,3.57 -8.78,3.36 -8.79,3.35 -9.08,3.35 -9.08,3.58 -9.07,3.59 -8.8,3.59
In1.Cu:
  region: -11.229,-5.288 -12.605,-6.664 -18.904,-6.664 -18.902,-6.666 -22.487,-6.666 -24.155,-8.334 -28.215,-8.334 -29.755,-6.794 -29.755,6.506 -28.885,7.376 -11.229,7.376
In2.Cu:
  region: -11.229,-5.288 -12.605,-6.664 -18.904,-6.664 -18.902,-6.666 -22.487,-6.666 -24.155,-8.334 -28.215,-8.334 -29.755,-6.794 -29.755,6.506 -28.885,7.376 -11.229,7.376
B.Cu:
  region: 17.835,-3.844 17.205,-3.844 17.205,-3.664 17.835,-3.664
  region: 18.525,3.976 17.895,3.976 17.895,4.156 18.525,4.156
  region: -8.77,-20.6 -8.77,-20.86 -9.54,-20.86 -9.53,-20.5 -8.87,-20.5
  region: 15.205,-6.824 15.025,-6.824 15.025,-6.194 15.205,-6.194
  region: 13.855,-2.544 13.675,-2.544 13.675,-1.914 13.855,-1.914
  region: 17.315,1.446 17.315,1.006 15.563,1.006 15.525,1.044 15.525,1.496 17.265,1.496
  region: 15.945,-3.464 15.945,-3.634 14.243,-3.634 14.155,-3.546 14.155,-3.414 15.895,-3.414
  region: 15.495,4.166 15.495,4.036 13.753,4.036 13.705,4.084 13.705,4.216 15.445,4.216
  region: -11.229,-5.288 -12.605,-6.664 -18.904,-6.664 -18.902,-6.666 -22.487,-6.666 -24.155,-8.334 -28.215,-8.334 -29.755,-6.794 -29.755,6.506 -28.885,7.376 -11.229,7.376
Edge.Cuts:
  circle w0.254: c18.385,-18.385 r2
  circle w0.254: c18.385,18.385 r2
  circle w0.254: c-18.385,-18.385 r2
  circle w0.254: c14.142,-14.142 r1.25
  circle w0.254: c-14.142,14.142 r1.25
  circle w0.254: c-18.385,18.385 r2
  circle w0.254: c14.142,14.142 r1.25
  circle w0.254: c0,0 r29
  circle w0: c0,0 r29
  circle w0.254: c-14.142,-14.142 r1.25
  circle w0: c-14.142,-14.142 r1.25
  lines w0.254: 26.73,-2.484 28.86,-2.484 28.86,2.586 26.73,2.586 26.73,-2.484

## Silkscreen, mask and mechanical layers (free items; w line width, h text height)
F.SilkS:
  circle w0.254: c-18.373,-18.399 r2.25
  circle w0.254: c-14.16,14.134 r2
  circle w0.254: c-14.133,-14.159 r2
  circle w0.254: c14.135,14.159 r2
  lines w0.254: -19.261,14.429 -18.411,14.429 -16.22,16.62 ; -16.22,16.34 -16.22,16.62 ; -4.285,-2.244 -3.555,-2.244 -3.325,-2.474 -3.325,-3.944 -3.325,-4.294 ; -3.515,-4.104 -3.325,-4.294 ; -2.5,0 0,0 0,2.5 ; -16.22,16.62 -16.59,16.62 -16.22,16.62 ; -3.325,-4.294 -3.145,-4.114 -3.325,-4.294 ; -12.075,15.584 -9.032,15.584 -9.032,18.921 -12.075,18.921 -12.075,15.584 ; -8.528,7.736 -5.125,7.736 -5.125,11.164 -8.528,11.164 -8.528,7.736
  text "BT0" at -16.962,21.173 h0.75
  text "3V3" at -17.002,19.693 h0.75
  text "UH" at 14.585,19.04 h0.75
  text "B" at -12.097,18.59 h0.75
  text "UL" at 14.585,18.033 h0.75
  text "VH" at 14.585,17.027 h0.75
  text "GND" at -22.612,16.903 h0.75
  text "VL" at 14.585,16.02 h0.75
  text "RESET" at -16.002,15.813 h0.75
  text "IW" at 0.565,13.674 h0.75
  text "RD0-" at -22.74,11.825 h0.75
  text "RD0+" at -19.96,11.825 h0.75
  text "IU" at 2.205,11.66 h0.75
  text "TD0-" at -17.555,11.092 h0.75
  text "WH" at 11.505,11.04 h0.75
  text "WL" at 15.06,10.967 h0.75
  text "B" at -9.342,9.623 h0.75
  text "IN" at -26.39,8.59 h1
  text "IV" at 2.125,7.15 h0.75
  text "C" at 25.575,5.507 h1.5
  text "1" at -28.635,4.757 h1
  text "CLK" at 2.095,3.72 h0.75
  text "CS" at 2.17,2.74 h0.75
  text "MO" at 2.095,1.76 h0.75
  text "Z" at -8.96,1.677 h0.75
  text "TXP" at -23.795,0.902 h0.75
  text "MI" at 2.095,0.78 h0.75
  text "TXN" at -23.795,-0.112 h0.75
  text "RXP" at -23.795,-1.125 h0.75
  text "RXN" at -23.795,-2.138 h0.75
  text "1" at -28.825,-4.053 h1
  text "A" at -0.68,-5.403 h0.75
  text "B" at -1.51,-6.013 h0.75
  text "12V" at -1.745,-7.72 h0.75
  text "A" at 25.535,-8.933 h1.5
  text "OUT" at -26.96,-11.57 h1
  text "RD1-" at -11.89,-12.515 h0.75
  text "TD1+" at -21.575,-13.085 h0.75
  text "TD1-" at -18.645,-13.095 h0.75
  text "RbMotor_ECAT_RevB+" at 8.258,-13.871 h1.5
  text "HPMicro" at 15.73,-16.807 h2
  text "24V" at 13.328,-18.307 h0.75
  text "GND" at -22.652,-18.617 h0.75
  text "24V" at -6.527,-28.81 h0.75
  text "GND" at -3.187,-28.81 h0.75
  text "24V" at 1.383,-28.81 h0.75
  text "GND" at 4.723,-28.81 h0.75
B.SilkS:
  circle w0.254: c14.155,-14.144 r2
  circle w0.254: c-14.145,14.136 r2
  circle w0.254: c-14.125,-14.154 r2
  circle w0.254: c0,0 r10.5
  circle w0.254: c0,0 r8
  circle w0.254: c14.155,14.166 r2
  lines w0.254: -14.165,-14.154 14.155,14.166 ; -14.145,14.156 14.155,-14.144 ; 1.71,18.46 6.065,18.46 6.065,20.87 1.71,20.87 1.71,18.46 ; 7.03,12.74 11.44,12.74 11.44,15.4 7.03,15.4 7.03,12.74
  text "A" at 7.05,17.83 h1
  text "A" at 11.34,14.8 h1
B.CrtYd:
  circle w0.254: c0,0 r10.5

## Text inside footprints (layer, text, board x,y; h text height)
locked: F.SilkS "1" at -11.787,11.024 h0.76 r270
locked: F.SilkS "1" at -21.383,-10.471 h0.76 r90